# Altium PCB PCB3.PcbDoc
Units mm, origin at the board's own origin, x right, y up, seen from the top; angles counter-clockwise.
Board outline 150 x 100 mm, 2 copper layers (Top Layer, Bottom Layer); 89 components, 48 nets, 252 pads, 20 vias.
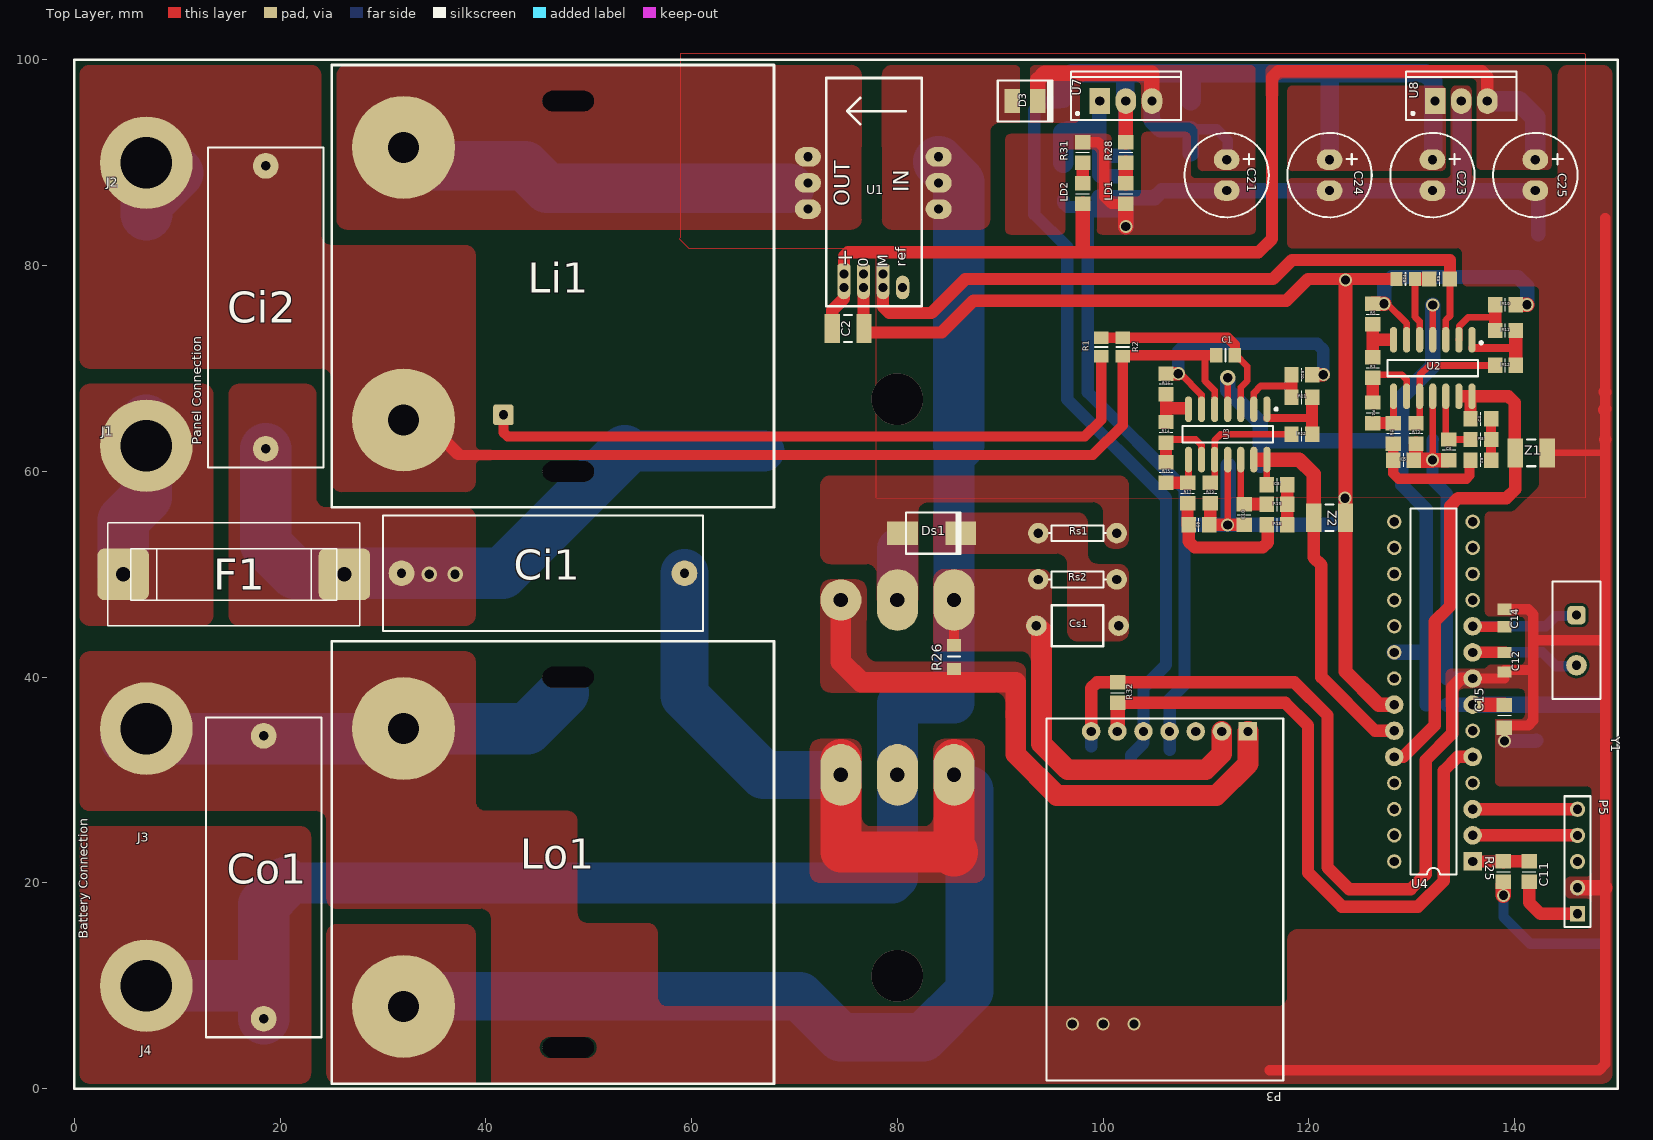
[diagram p0: Top Layer view]
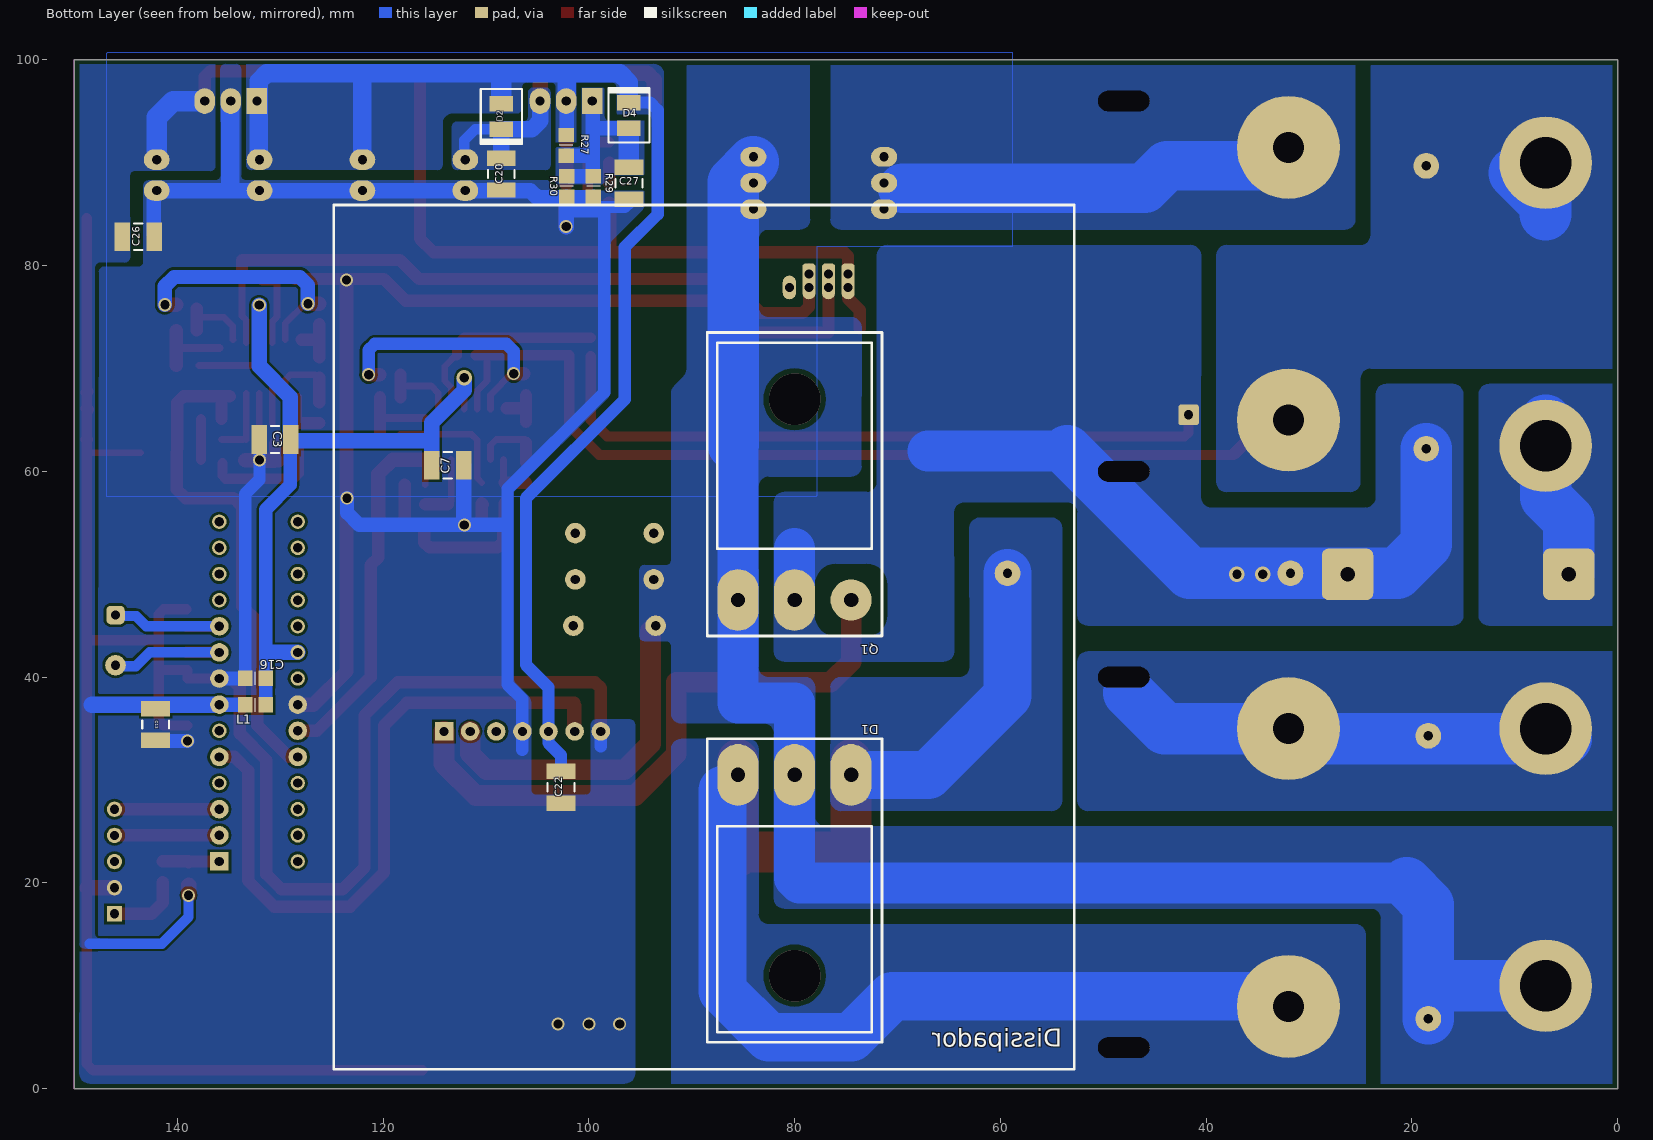
[diagram p1: Bottom Layer view, seen from below]

## Layer stack, top to bottom
Top Layer: signal copper 0.0356
Dielectric: dielectric 0.32, FR-4, Dk 4.8
Bottom Layer: signal copper 0.0356

## Board outline
0,0 0,100 150,100 150,0

## Design rules (kind name [scope] priority, off if disabled: settings)
Clearance "Clearance Digicart" [All] p1: gap=0.25
Height [All] p1: minheight=0 maxheight=50.8 prefheight=12.7
HoleSize [All] p1: absolutevalues=TRUE maxlimit=5.08 minlimit=0.025 maxpercent=80.000 minpercent=20.000
MinimumSolderMaskSliver [All] p1: minsoldermaskwidth=0.127
PolygonConnect [All] p1: connectstyle=Direct reliefconductorwidth=0.254 reliefentries=4 polygonreliefangle="90 Angle"
RoutingTopology Top [OnLayer('Top Layer')] p1: topology=Shortest
RoutingTopology Bottom [OnLayer('Bottom Layer')] p2: topology=Vertical
RoutingVias [All] p1: holewidth=0.711 width=1.27 viastyle="Through Hole" minholewidth=0.711 minwidth=1.27 maxholewidth=0.711 maxwidth=1.27
SilkscreenOverComponentPads SilkToSolderMaskClearance [IsPad] p1: minsilkscreentomaskgap=0.127
SolderMaskExpansion [All] p1: expansion=0.102
Width ClassPanelBetweenBatteryConnection [InNetClass('PanelBetweenBatteryConnection')] p1: maxlimit=5.08 minlimit=0.508 preferedwidth=4.826 minimp=50.000000 maximp=50.000000 favimp=50.000000
Width Width_1 [All] p2: maxlimit=5 minlimit=0.203 preferedwidth=0.254 minimp=50.000000 maximp=50.000000 favimp=50.000000
23 further rules are at their usual default settings.

## Classes and differential pairs
net class PanelBetweenBatteryConnection: +VBAT +VPANEL GND NetCi1_2 NetLi1_2 VPNL_N
component class voltageSupplies: C20 C21 C22 C23 C24 C25 C26 C27 D2 D3 D4 LD1 LD2 R27 R28 R29 R30 R31 U7 U8
component class uController: C11 C12 C13 C14 C15 C16 L1 P5 R25 R32 U4 U5 U6 Y1
component class Signals: C3 C4 C5 C6 C7 C8 C9 C10 R3 R4 R5 R6 R7 R8 R9 R10 R11 R12 R13 R14 R15 R16 R17 R18 R19 R20 R21 R22 R23 U2 U3 Z1 Z2
component class cuk: C1 C2 Ci1 Ci2 Co1 Cs1 D1 Ds1 F1 J1 J2 J3 J4 Li1 Lo1 P3 Q1 R1 R2 R24 R26 Rs1 U1

## Components (designator, comment, footprint, x,y, rotation, side; value= is the part's Value field where it differs from the comment)
C1 "Cap" 6-0805_N#1 111.9,71.3 r180 top
C2 "Cer" C1210_M 75.2,73.9 r0 top
C3 "Cer" C1210_M 130.5,63.1 r180 bottom
C4 "Cer" 6-0805_M#1 136.7,65.1 r180 top
C5 "Cer" 6-0805_M#1 129.2,61.1 r180 top
C6 "Cer" 6-0805_M#1 133.6,62.1 r90 top
C7 "Cer" C1210_M 113.7,60.6 r0 bottom
C8 "Cer" 6-0805_M#1 116.9,58.7 r180 top
C9 "Cer" 6-0805_M#1 109.3,54.8 r180 top
C10 "Cer" 6-0805_M#1 113.7,55.8 r90 top
C11 "Cap" 6-0805_M#1 141.4,21.1 r270 top
C12 "Cap" C0805#1 139,41.5 r90 top
C13 "Cap" C1210_M 142.1,35.4 r270 bottom
C14 "Cap" C0805#2 139,45.8 r270 top
C15 "Cap" 6-0805_M#2 139,36.3 r270 top
C16 "Cap" 6-0805_M#1 132.4,39.9 r0 bottom
C20 "Cap" C1210_M 108.5,88.9 r90 bottom
C21 "Cap" CAPELTR-RAD4.1-DPP3.0 112,87.3 r90 top
C22 "Cap" C1210_M 102.7,29.3 r90 bottom
C23 "Cap" CAPELTR-RAD4.1-DPP3.0 132,87.3 r90 top
C24 "Cap" CAPELTR-RAD4.1-DPP3.0 122,87.3 r90 top
C25 "Cap" CAPELTR-RAD4.1-DPP3.0 142,87.3 r90 top
C26 "Cap" C1210_M 143.8,82.8 r0 bottom
C27 "Cap" C1210_M 96.1,88 r90 bottom
Ci1 "Cap" "CAP4U7 EPCOS" 30,44.5 r0 top
Ci2 "Cap" "CAP4U7 EPCOS" 13,91.5 r270 top
Co1 "Cap" "CAP4U7 EPCOS" 24,5 r90 top
Cs1 "Cap" 100nF 95,45 r0 top
D1 "60APU06" TO-247AC_HORIZONTAL#1 80,11 r0 bottom
D2 "BYD77" SOD87#1 108.5,94.5 r270 bottom
D3 "Diode 1N4002" SOD87#1 92.4,96 r0 top
D4 "1N4002" SOD87#1 96.1,94.6 r90 bottom
Ds1 "BYD77" SOD87#2 83.5,54 r0 top
F1 "Fuse 1" "FUSE HOLDER 5X20" 15.5,50 r0 top
J1 "ManufacturerPartNumber" PARAFUSO#1 7.6,57.927 r0 top
J2 "ManufacturerPartNumber" PARAFUSO#2 8.1,84.3 r0 top
J3 "ManufacturerPartNumber" PARAFUSO#3 7.1,32.3 r0 top
J4 "ManufacturerPartNumber" PARAFUSO#4 7.1,11.3 r0 top
L1 "Ferrite Bead" 6-0805_M#1 132.4,37.3 r0 bottom
LD1 "RED" 6-0805_M#1 102.2,87 r270 top
LD2 "RED" 6-0805_M#1 98,87 r90 top
Li1 "Inductor" NEE-42-20-DEITADO#1 32,78 r90 top
Lo1 "Inductor" NEE-42-20-DEITADO#2 32,22 r90 top
P3 "Driver (INEP)" "Driver INEP" 117.5,36 r180 top
P5 "UART" HDR1X5 146.1,17 r90 top
Q1 "IRFP260" TO-247AC_HORIZONTAL#2 80,67 r180 bottom
R1 "Res1" 6-0805_N#1 99.8,72.1 r90 top
R2 "Res1" 6-0805_N#1 101.9,72.1 r270 top
R3 "1%" 6-0805_M#1 126.2,70.1 r90 top
R4 "1%" 6-0805_M#1 126.2,65.7 r90 top
R5 "1%" 6-0805_M#1 126.2,75.3 r270 top
R6 "1%" 6-0805_M#1 128.2,63.7 r90 top
R7 "1%" 6-0805_M#1 136.7,61.1 r180 top
R8 "1%" 6-0805_M#1 136.7,63.1 r0 top
R9 "1%" 6-0805_M#1 132.7,78.7 r180 top
R10 "1%" 6-0805_M#1 139.1,76.2 r0 top
R11 "1%" 6-0805_M#1 139.1,73.7 r180 top
R12 "1%" 6-0805_M#1 139.1,70.3 r0 top
R13 "1%" 6-0805_M#1 130.4,63.7 r90 top
R14 "1%" 6-0805_M#1 106.1,63.8 r90 top
R15 "1%" 6-0805_M#1 106.1,59.9 r90 top
R16 "1%" 6-0805_M#1 106.1,68.5 r270 top
R17 "1%" 6-0805_M#1 108.2,57.9 r90 top
R18 "1%" 6-0805_M#1 116.9,54.8 r180 top
R19 "1%" 6-0805_M#1 116.9,56.8 r0 top
R20 "1%" 6-0805_M#1 119.3,69.4 r0 top
R21 "1%" 6-0805_M#1 119.3,67.2 r180 top
R22 "1%" 6-0805_M#1 119.3,63.6 r0 top
R23 "1%" 6-0805_M#1 110.4,57.9 r90 top
R24 "Res1" 6-0805_N#1 129.4,78.7 r180 top
R25 "Res1" 6-0805_M#1 138.9,21.1 r270 top
R26 "Res1" 6-0805_N#2 85.5,42 r90 top
R27 "Res1" 6-0805_M#1 102.2,91.7 r270 bottom
R28 "Res1" 6-0805_M#1 102.2,91 r90 top
R29 "Res1" 6-0805_M#1 99.55,87.7 r90 bottom
R30 "Res1" 6-0805_M#1 102.15,87.7 r90 bottom
R31 "Res1" 6-0805_M#1 98,91 r270 top
R32 "Res1" 6-0805_M#1 101.4,38.5 r270 top
Rs1 "1%" AXIAL-0.3 97.5,54 r0 top
Rs2 "1%" AXIAL-0.3 97.5,49.5 r180 top (schematic designator Rs1)
U1 "LTSP 25-NP" "LTSP 25-NP" 84,85.5 r90 top
U2 "LP324M" M14A_M#1 132.03,70.05 r270 top
U3 "LP324M" M14A_M#2 112.1,63.6 r270 top
U4 "ATmega328p" 28P3 132.1,38.6 r90 top
U7 "TL783" TO-220AB 102.2,96 r0 top
U8 "LM7805" TO-220AB 134.8,96 r0 top
Y1 "ManufacturerPartNumber" HC-49U 146,43.6 r270 top
Z1 "5V1" C1210_M 141.6,61.8 r180 top
Z2 "5V1" C1210_M 122,55.5 r180 top

## Footprints (in the part's own frame and the unit in brackets; to place one, negate y for a bottom-side part, rotate by r counter-clockwise, add the part's x,y. Pads: shape width x height; smd on the part's side, far side on the other; paste and mask are expansions set on the pad)
6-0805_M#1 [mm] "Chip Resistor, Body 2.0x1.2mm, IPC Low Density"
  rect 1.4x1.5 smd: 1(-1,0) 2(1,0)
  silkscreen extent 0,-0.65 0,0.65, body extent -1.07,-0.7 1.07,0.7, height 0.7
6-0805_M#2 [mm] "Chip Resistor, Body 2.0x1.2mm, IPC Low Density"
  rect 1.4x1.5 smd: 1(-1,0) 2(1.2,0)
  silkscreen extent 0,-0.65 0,0.65, body extent -1.07,-0.7 1.07,0.7, height 0.7
6-0805_N#1 [mm] "Chip Resistor, Body 2.0x1.2mm, IPC Medium Density"
  rect 1.2x1.4 smd: 1(-0.9,0) 2(0.9,0)
  silkscreen extent 0,-0.6 0,0.6, body extent -1.07,-0.7 1.07,0.7, height 0.7
6-0805_N#2 [mm] "Chip Resistor, Body 2.0x1.2mm, IPC Medium Density"
  rect 1.2x1.4 smd: 1(-1.2,0) 2(1.1,0)
  silkscreen extent 0,-0.6 0,0.6, body extent -1.07,-0.7 1.07,0.7, height 0.7
28P3 [mm] "DIP; 28 Leads; Row Spacing 7.62 mm; Pitch 2.54 mm"
  rect 1.8x1.8 hole 0.9: 1(-16.51,-3.81)
  round 1.8 hole 0.9: 2(-13.97,-3.81) 3(-11.43,-3.81) 5(-6.35,-3.81) 7(-1.27,-3.81) 8(1.27,-3.81) 9(3.81,-3.81) 10(6.35,-3.81) 22(-1.27,3.81) 23(-3.81,3.81) 24(-6.35,3.81)
  round 1.4 hole 0.9: 4(-8.89,-3.81) 6(-3.81,-3.81) 11(8.89,-3.81) 12(11.43,-3.81) 13(13.97,-3.81) 14(16.51,-3.81) 15(16.51,3.81) 16(13.97,3.81) 17(11.43,3.81) 18(8.89,3.81) 19(6.35,3.81) 20(3.81,3.81) 21(1.27,3.81) 25(-8.89,3.81) 26(-11.43,3.81) 27(-13.97,3.81) 28(-16.51,3.81)
  silkscreen extent -17.78,-2.22 17.78,2.22
100nF [mm]
  round 2 hole 0.9: 1(-1.5,0) 2(6.5,0)
  silkscreen extent 0,-2 5,2
AXIAL-0.3 [mm] "Axial Device, Thru-Hole; 2 Leads; 0.3 in Pin Spacing"
  round 2 hole 0.9: 1(-3.81,0) 2(3.81,0)
  silkscreen extent -2.77,-0.76 2.77,0.76
C0805#1 [mm] "Chip Capacitor, Body 2.0x1.3mm, IPC High Density"
  rect 1.1x1.4 smd: 1(-1,0) 2(0.9,0)
  body extent -1.1,-0.72 1.1,0.72, height 1.4
C0805#2 [mm] "Chip Capacitor, Body 2.0x1.3mm, IPC High Density"
  rect 1.1x1.4 smd: 1(-0.8,0) 2(0.9,0)
  body extent -1.1,-0.72 1.1,0.72, height 1.4
C1210_M [mm] "Chip Capacitor, Body 3.2x2.5mm, IPC Low Density"
  rect 1.5x2.8 smd: 1(-1.55,0) 2(1.55,0)
  silkscreen extent -0.4,-1.3 0.4,1.3, body extent -1.7,-1.35 1.7,1.35, height 1.5
"CAP4U7 EPCOS" [mm]
  round 2.5 hole 0.9: 1(1.8,5.6) 2(29.3,5.6)
  silkscreen extent 0,0 31.1,11.2
CAPELTR-RAD4.1-DPP3.0 [mm] "Capacitor Eletrolitico Radial 4.1mm com 3.0mm entre pinos"
  oval 2x2.5 hole 0.9: 1(0,0) 2(3,0)
  silkscreen extent -2.6,-4.1 5.6,4.1
"Driver INEP" [mm] "Connector; Header; 7 Position"
  rect 1.8x1.8 hole 0.9: 1(3.429,1.27)
  round 1.8 hole 0.9: 2(5.969,1.27) 3(8.509,1.27) 4(11.049,1.27) 5(13.589,1.27) 6(16.129,1.27) 7(18.669,1.27)
  silkscreen extent 0,0 23,35.2
"FUSE HOLDER 5X20" [mm] "Fuse Holder for 5x20mm Fuses - Pin Spacing 21.5mm"
  rrect25% 5x5 hole 1.4: 1(-10.75,0) 2(10.75,0)
  silkscreen extent -12.25,-5 12.25,5, body extent -12.25,-5.05 12.15,4.95, height 10.5
HC-49U [mm] "Quartz Crystal, Thru-Hole; 2 Leads; Body 11.35 x 4.65 x 13.46 mm (LxWxH max)"
  rrect50% 1.8x1.8 hole 0.9: 1(-2.44,0)
  round 2 hole 0.9: 2(2.44,0)
  silkscreen extent -5.7,-2.35 5.7,2.35
HDR1X5 [mm] "Connector; Header; 5 Position"
  rect 1.5x1.5 hole 0.9: 1(0,0)
  round 1.5 hole 0.9: 2(2.54,0) 3(5.08,0) 4(7.62,0) 5(10.16,0)
  silkscreen extent -1.27,-1.27 11.43,1.27
"LTSP 25-NP" [mm] "Current Transducer (25 A)"
  oval 1.9x2.54 hole 0.9: 1(0,0) 2(2.54,0) 3(5.08,0) 4(5.08,12.7) 5(2.54,12.7) 6(0,12.7)
  oval 2.3x1.3 hole 0.9: 7(-7.62,9.2) 8(-7.62,7.3) 9(-7.62,5.4) 10(-7.62,3.5)
  silkscreen extent -9.46,1.65 12.74,10.92
M14A_M#1 [mm] "SOIC, 14-Leads, Body 8.6x3.9mm, Pitch 1.27mm, IPC Low Density"
  oval 2.5x0.7 smd: 1(-2.75,3.81) 2(-2.75,2.54) 3(-2.75,1.27) 4(-2.75,0) 5(-2.75,-1.27) 6(-2.75,-2.54) 7(-2.75,-3.81) 8(2.75,-3.81) 9(2.75,-2.54) 10(2.75,-1.27) 11(2.75,0) 12(2.75,1.27) 13(2.75,2.54) 14(2.75,3.81)
  silkscreen extent -2.57,-4.4 0.8,4.84, body extent -2,-4.38 2,4.38, height 1.75
M14A_M#2 [mm] "SOIC, 14-Leads, Body 8.6x3.9mm, Pitch 1.27mm, IPC Low Density"
  oval 2.5x0.7 smd: 1(-2.45,3.81) 2(-2.45,2.54) 3(-2.45,1.27) 4(-2.45,0) 5(-2.45,-1.27) 6(-2.45,-2.54) 7(-2.45,-3.81) 8(2.45,-3.81) 9(2.45,-2.54) 10(2.45,-1.27) 11(2.45,0) 12(2.45,1.27) 13(2.45,2.54) 14(2.45,3.81)
  silkscreen extent -2.57,-4.4 0.8,4.84, body extent -2,-4.38 2,4.38, height 1.75
NEE-42-20-DEITADO#1 [mm]
  round 10 hole 3: 1(-13,0) 2(13.5,0)
  silkscreen extent -21.5,-36 21.5,7
NEE-42-20-DEITADO#2 [mm]
  round 10 hole 3: 1(13,0) 2(-14,0)
  silkscreen extent -21.5,-36 21.5,7
PARAFUSO#1 [mm]
  round 9 hole 5: 1(-0.6,4.573)
PARAFUSO#2 [mm]
  round 9 hole 5: 1(-1.1,5.7)
PARAFUSO#3 [mm]
  round 9 hole 5: 1(-0.1,2.7)
PARAFUSO#4 [mm]
  round 9 hole 5: 1(-0.1,-1.3)
SOD87#1 [mm]
  rect 1.5x2.3 smd: A(-1.253,0) K(1.253,0)
  silkscreen extent -2.65,-2.01 2.65,2.01
SOD87#2 [mm]
  rect 3x2.3 smd: A(-3,0) K(2.65,0)
  silkscreen extent -2.65,-2.01 2.65,2.01
TO-220AB [mm] "TO, Thru-Hole, Vertical, Heatsink Mounted; 3 In-Line Leads; Pitch 2.54 mm"
  rect 2x2.5 hole 0.9: 1(-2.54,0)
  oval 2x2.5 hole 0.9: 2(0,0) 3(2.54,0)
  silkscreen extent -5.35,-1.85 5.35,2.85, body extent -5.4,-1.9 5.4,2.9, height 19.3
TO-247AC_HORIZONTAL#1 [mm]
  oval 4x6 hole 1.4: 1(-5.5,-19.5) 2(0,-19.5) 3(5.5,-19.5)
  silkscreen extent -8.5,-23 8.5,6.5, body extent -7.75,-19.8 7.75,5.6, height 8
TO-247AC_HORIZONTAL#2 [mm]
  round 4 hole 1.4: 1(5.5,-19.5)
  oval 4x6 hole 1.4: 2(0,-19.5) 3(-5.5,-19.5)
  silkscreen extent -8.5,-23 8.5,6.5, body extent -7.75,-19.8 7.75,5.6, height 8

## Part data
C1 C11 C13 C15 C16 C20 C21 C22 C23 C24 C25 C26 C27 Ci1 Ci2 Co1 Cs1: "Capacitor"
C2 C3 C4 C5 C6 C7 C8 C9 C10: library part Cap, "Capacitor"
C12 C14: library part "Cap Semi", "Capacitor (Semiconductor SIM Model)"
D2 D4 Ds1: library part "Diode 1N4002", "1 Amp General Purpose Rectifier"
D3: "1 Amp General Purpose Rectifier"
F1: "Fuse"
J1 J2 J3 J4: library part PIN_BIG
L1: library part Inductor, "Inductor"
LD1 LD2: library part LED, "Diodo Emissor de Luz"
P3: library part "Header 7", "Header, 7-Pin"
P5: library part "Header 5", "Header, 5-Pin"
Q1: "HEXFET Power MOSFET"
R1 R2 R24 R25 R26 R27 R28 R29 R30 R31 R32: "Resistor"
R3 R4 R5 R6 R7 R8 R9 R10 R11 R12 R13 R14 R15 R16 R17 R18 R19 R20 R21 R22 R23 Rs1 Rs2: library part Res1, "Resistor"
U1: "Current Transducer LTSP (25 A)"
U2 U3: "Micropower Quad Operational Amplifier"
U4: library part ATmega8-16PI, "8-Bit AVR Microcontroller with 8K Bytes of In-System Programmable Flash Memory"
U7: library part L7805ACV, "Precision 1A Regulator"
U8: library part µA7805CKC, "Positive-Voltage Regulator"
Y1: library part Crystal, "Crystal Oscillator"
Z1 Z2: library part "D Zener", "Zener Diode"

## Free pads (board coordinates)
  rrect100% 5x1 hole 2 slot 5 at 0 deg: 0(48,4) 0(48,40) 0(48,60) 0(48,96)
  rrect50% 1.3x2 hole 0.9: 1(74.8,79.2) 1(76.7,79.2) 1(78.6,79.2)
  rrect25% 2x2 hole 0.9: 2(41.7,65.5)

## Via types
v1: diameter 1.27, hole 0.9, Top Layer to Bottom Layer, 15 vias
v2: diameter 1.5, hole 0.9, Top Layer to Bottom Layer, 3 vias
v3: diameter 5, hole 5, Top Layer to Bottom Layer, 2 vias

## Nets (pads, with @x,y where several pads share a name; then routed paths per layer and width w, separated by ;. In a path a pad name is that pad's centre, name@x,y a point inside that pad or via, vN(x,y) a via of type N, cw(c..) or ccw(c..) an arc to the next point about the centre after c; other vN are vias at no path point)
+5V: C2.1 C13.1 C15.1 C25.2 C26.2 L1.2 LD2.1 pad.1@74.8,79.2 R25.2 U1.7 U4.7 U8.3 | length 133.7
  Top Layer w1: C15.1@138.97,37.33 C15.1
  Top Layer w1.2: C2.1 73.65,75.65 74.8,76.8 U1.7 ; pad.1@74.8,79.3 74.8,80.9 75.2,81.3 115.1,81.3 116.4,82.6 116.4,98.3 117,98.9 136.8,98.9 137.34,98.36 137.34,96.2 U8.3@137.14,96
  Top Layer w1.4: 98,81.7 LD2.1 ; U4.7 C15.1@138.97,37.33
  Top Layer w1.5: v1(138.9,18.8) R25.2@138.9,19.8
  Bottom Layer w1: L1.2 L1.2@133.43,37.33 ; v1(138.9,18.8) 138.9,16.7 141.5,14.1 148.5,14.1 ; 148.33,37.33 148.5,37.5
  Bottom Layer w1.4: L1.2@133.43,37.33 U4.7
  Bottom Layer w1.6: U4.7 148.33,37.33
  Bottom Layer w2: U8.3 140.4,96 142,94.4 C25.2
+5V_ADC: C3.2 C7.2 C16.1 L1.1 U2.4 U3.4 U4.20 | length 73.7
  Top Layer w0.65: U3.4 v2@112.1,68.9 ; U2.4@132.03,72.5 U2.4 v1(132.03,76.17)
  Bottom Layer w1.3: C3.2@129,63 129,58.7 131.4,56.3 C16.1 L1.1
  Bottom Layer w1.5: v2@112.1,68.9 112.1,67.9 115.25,64.75 C7.2 ; 115.25,63 C3.2@129,63 ; U4.20 131.1,42.41 ; C3.2@129,63.1 129,67.2 132.03,70.23 v1(132.03,76.17)
  other v2: 112.1,69.1
+12V: C22.2 C23.2 C24.2 D2.A D4.K P3.5 R27.1 R28.2 U7.2 U8.1 | length 141.8
  Top Layer w0.508: U7.2@102.16,96.84 102.16,95.9 U7.2@102.3,96.04
  Top Layer w1.4: U7.2@102.16,95.9 102.2,95.86 R28.2
  Bottom Layer w1.2: D4.K@95.753,95.853 94.053,95.853 93.3,95.1 93.3,85 96.5,81.8 96.5,67 106.1,57.4 106.1,41.2 103.911,39.011 P3.5 103.911,33.611 102.7,32.4 C22.2
  Bottom Layer w1.4: U7.2@102.16,95.9 102.16,92.74 R27.1 ; 108.5,98.1 108.5,98.7
  Bottom Layer w1.5: U7.2@102.16,95.9 U7.2@102.25,95.81
  Bottom Layer w1.8: D4.K@96.1,96.2 96.1,97.8 97,98.7 102.16,98.7 ; U7.2@102.16,95.9 102.16,98.7 ; C24.2 122,98.7 ; C23.2@132.06,90.3 132.06,97.94 131.3,98.7 122,98.7 ; 102.16,98.7 108.5,98.7 122,98.7
  Bottom Layer w2: D2.A@108.5,96.1 108.5,98.1
+VBAT: Co1.1 Cs1.1 D1.2 D3.A J4.1 P3.2 Q1.3 R26.2 Rs2.2 U1.1 U1.2 U1.3 | length 197.6
  Top Layer w1: R26.2@85.5,43.6 Q1.3
  Top Layer w2: Cs1.1 94,44.5 94,33.536 96.536,31 109.964,31 111.531,32.567 P3.2
  Bottom Layer w4: 20.5,20 79.5,20 80,20.5 D1.2 80,37.5 85.5,37.5 Q1.3 85.5,62.128
  Bottom Layer w5: J4.1 18.4,10 ; Co1.1 18.4,10 ; 20.5,20 18.4,17.9 18.4,10 ; U1.3@84,90.08 85.953,88.127 85.953,62.581
+VPANEL: Ci1.1 Ci2.2 Ds1.A F1.2 pad.0@48,60 pad.2 Q1.2 R1.1 Rs1.2 | length 135.6
  Top Layer w1: pad.2 41.7,63.8 42.1,63.4 98.2,63.4 99.8,65 R1.1
  Bottom Layer w4: 53.5,62 67,62 ; Q1.2 80,52.5
  Bottom Layer w5: Ci2.2 18.6,52.9 21.4,50.1 Ci1.1 41.6,50.1 53.5,62
  other v2: 34.5,50 37,50
GATE: P3.1 Q1.1 R26.1 | length 59.5
  Top Layer w2: Q1.1 74.5,41.5 76.5,39.5 85.5,39.5 91.5,39.5 91.5,32.5 95.5,28.5 111,28.5 114.071,31.571 P3.1
GND: C2.2 C3.1 C5.1 C6.1 C7.1 C9.1 C10.1 C12.1 C13.2 C14.1 C15.2 C16.2 C20.1 C21.1 C22.1 C23.1 C24.1 C25.1 C26.1 C27.1 Co1.2 J3.1 LD1.2 Lo1.1 P3.4 P3.7 P5.2 pad.0@48,40 pad.1@76.7,79.2 R13.1 R23.1 R24.2 R29.1 R30.1 R31.1 R32.1 U1.8 U2.11 U3.11 U4.8 U4.22 U8.2 Z1.1 Z2.1 | length 588.5
  Top Layer w0.65: v1(112.1,54.8) U3.11 ; v1@132.025,61.1 132.025,67.595 U2.11@132.03,67.6 ; C6.1@133.4,61.1 C6.1 ; Z1.1@143.55,61.8 148.8,61.8
  Top Layer w1: R31.1 99.5,92 100.1,91.4 100.1,86.7 100.8,86 LD1.2@101.9,86 ; 116.2,1.8 148.2,1.8 148.8,2.4 148.8,43.6 ; U4.8 139,39.87 139,40.7 141.5,40.7 141.8,41 ; C15.2@139,35.3 141.3,35.3 141.8,35.8 141.8,41 ; C14.1@139.1,46.6 141.3,46.6 141.8,46.1 141.8,41 ; 142.1,43.6 148.8,43.6 ; 148.8,84.6 148.8,67.7 148.8,66.1 148.8,63.1 148.8,43.6
  Top Layer w1.2: U1.8 76.7,73.5 84.3,73.5 87.4,76.6 117.8,76.6 119.9,78.7 R24.2 ; P3.7 98.831,38.931 99.4,39.5 R32.1 118.6,39.5 121.8,36.3 121.8,21.504 123.904,19.4 129.896,19.4 131.35,20.854 131.35,31.95 133.91,34.51 133.91,39.01 134.77,39.87 U4.8 ; R23.1@110.3,56.8 R23.1 110.4,54.9 C9.1 v1(112.1,54.8) C10.1 ; v1(132,61.1) v1@132.025,61.1 ; 148.7,66 148.8,66.1 ; 148.75,67.75 148.8,67.7
  Top Layer w1.4: v1(123.55,78.6) Z2.1 123.55,40.55 126.77,37.33 U4.22 ; C5.1 130.4,61.3 R13.1 ; v1@132.025,61.1 C6.1@133.4,61.1
  Top Layer w1.5: v1(102.2,83.8) LD1.2@102.2,85.7 ; C5.1@130.6,61.1 v1(132,61.1) ; P5.2 148.76,19.54
  Bottom Layer w1: C16.2 C16.2@133.43,39.87
  Bottom Layer w1.2: C27.1 96.1,86.1 96.5,85.7 100.5,85.7 R30.1@101.4,86.6 ; 98.831,33.269 P3.7 ; 102.2,85.3 98.5,85.3 98.5,67.7 107.9,58.3 107.9,39.3 106.451,37.851 P3.4 106.451,32.951 ; C3.1 132,63.05 v1(132,61.1) 132,59.2 133.4,57.8 C16.2
  Bottom Layer w1.4: R29.1@99.55,86.6 R29.1 ; 108.1,54.8 v1(112.1,54.8) 122.3,54.8 123.5,56 v1(123.5,57.4) ; C16.2@133.43,39.87 U4.8 ; v1(139,33.8) 142.05,33.8 C13.2 ; C26.1@142.3,83.05 C25.1@142.3,87.3
  Bottom Layer w1.5: R29.1@99.55,86.6 101.4,86.6 R30.1@102.1,86.6 ; v1(102.2,83.8) 102.2,85.3 R30.1@102.2,86.6 ; R30.1@102.2,86.65 R30.1@102.2,86.6 ; v1@112.15,54.85 C7.1 ; C25.1 C21.1 105.7,87.3 105,86.6 R30.1@102.2,86.6
  Bottom Layer w1.8: 134.85,87.7 U8.2@134.85,95.95
  Bottom Layer w5: J3.1@5,34 Lo1.1@32,34 ; Lo1.1 44,35 47.5,38.5
  other v1: 97,6.3 100,6.3 103,6.3
NetC4_1: C4.1 R7.1 R8.2 | length 4
  Top Layer w1: R7.1 R8.2 C4.1
NetC4_2: C4.2 U2.13 U2.14 U4.24 Z1.2 | length 49.7
  Top Layer w1.2: U4.24 129.15,32.25 132.21,35.31 132.21,45.41 133.7,46.9 133.7,56.6 134.5,57.4 139.2,57.4 140.05,58.25 Z1.2 ; U2.13@134.9,67.3 U2.14 ; C4.2 135.7,67.16 U2.14 ; Z1.2@140,62.25 140,66.7 139.4,67.3 U2.14
NetC5_2: C5.2 R6.1 R7.2 | length 11.8
  Top Layer w1: R6.1 128.2,59.8 128.7,59.3 135.3,59.3 135.6,59.6 R7.2@135.6,60.8
NetC6_2: C6.2 R8.1 U2.12 | length 6.6
  Top Layer w0.65: C6.2@133.3,63.1 U2.12@133.3,67.6 ; C6.2 R8.1
NetC8_1: C8.1 R18.1 R19.2 | length 3.9
  Top Layer w1.2: R18.1@117.8,54.8 117.9,54.9 R19.2 C8.1
NetC8_2: C8.2 U3.13 U3.14 U4.23 Z2.2 | length 37.3
  Top Layer w0.65: C8.2 115.91,58.71 U3.14@115.91,60.79
  Top Layer w1.2: Z2.2@120.45,55.7 120.45,51.65 121.2,50.9 121.2,40 126.41,34.79 U4.23
  Top Layer w1.4: 115,61.15 115.55,61.15 ; U3.14 119.05,61.15 120.45,59.75 Z2.2
NetC9_2: C9.2 R17.1 R18.2 | length 13.4
  Top Layer w1.2: C9.2@108.2,54.8 R17.1 ; C9.2 108.3,53.2 108.9,52.6 115.5,52.6 116,53.1 R18.2@116,54.6
NetC10_2: C10.2 R19.1 U3.12 | length 6.7
  Top Layer w0.65: U3.12 113.37,57.13 C10.2
  Top Layer w1.2: C10.2 R19.1
NetC11_1: C11.1 R25.1 U4.1 | length 5.5
  Top Layer w1.2: U4.1 138.81,22.09 R25.1@138.9,22 ; R25.1 C11.1
NetC12_2: C12.2 U4.9 Y1.2 | length 13.8
  Top Layer w1: C12.2@139.09,42.41 C12.2@139.1,42.4
  Top Layer w1.1: U4.9 C12.2@139.09,42.41
  Bottom Layer w1: U4.9 142.69,42.41 144.04,41.06 Y1.2@146,41.06
NetC14_2: C14.2 U4.10 Y1.1 | length 13.7
  Top Layer w1: U4.10 135.96,44.9 C14.2@139.1,44.9
  Bottom Layer w1: U4.10 143,44.95 143.99,45.94 Y1.1@146,45.94
NetC20_2: C20.2 C21.2 D2.K D3.K U7.3 | length 30.3
  Top Layer w1.5: D3.K 93.653,98.053 94.3,98.7 104.7,98.7 U7.3@104.7,95.9
  Bottom Layer w1: D2.K 111.053,93.247 112.1,92.2 C21.2@112.1,90.4
  Bottom Layer w1.6: U7.3@104.7,95.9 104.7,94.1 105.553,93.247 D2.K C20.2@108.5,90.9
NetC27_2: C27.2 D4.A R27.2 R29.2 R30.2 U7.1 | length 18.4
  Top Layer w0.508: U7.1@99.62,95.42 U7.1@99.62,95.9
  Bottom Layer w1.4: D4.A@96.547,93.347 99.453,93.347 ; U7.1@99.75,95.77 99.62,95.9 99.62,90.7 ; R30.2@101.85,88.7 99.75,88.7 99.62,88.83 99.62,90.7 ; R27.2 99.62,90.7
  Bottom Layer w2: C27.2@96.1,90 D4.A@96.1,92.9
NetCi1_2: Ci1.2 D1.1 D1.3 Lo1.2 pad.0@48,4 | length 135.3
  Top Layer w4: D1.1@74.5,32 74.5,23 85.5,23 D1.3@85.5,32
  Bottom Layer w4.699: Lo1.2@32,9 70.5,9 74.5,5 82.5,5 87,9.5 D1.3@87,29 ; Ci1.2 59.3,38.2 67,30.5 72.5,30.5
NetCs1_2: Cs1.2 Ds1.K Rs1.1 Rs2.1
NetF1_1: F1.1 J1.1 | length 15.9
  Bottom Layer w5: F1.1 4.75,55.25 7,57.5 J1.1@7,65
NetLD1_1: LD1.1 R28.1 | length 2
  Top Layer w1.4: LD1.1 R28.1
NetLD2_2: LD2.2 R31.2 | length 2
  Top Layer w1.2: LD2.2 R31.2
NetLi1_2: Li1.2 pad.0@48,96 U1.4 U1.5 U1.6 | length 38.3
  Bottom Layer w4.826: Li1.2@32.1,89.7 43.8,89.7 45.96,87.54 69.5,87.54
NetR3_1: R3.1 R4.2 U2.9 | length 6.8
  Top Layer w0.65: R3.1@126.6,69.41 128.99,69.41 129.49,68.91 U2.9@129.49,67.6
  Top Layer w1.2: R4.2 R3.1
NetR3_2: R3.2 R5.2 U2.7 | length 4.7
  Top Layer w1.2: R3.2 R5.2 ; 126.4,72.8 U2.7@127.9,72.8
NetR4_1: R4.1 R6.2 U2.8 | length 4.6
  Top Layer w0.65: R6.2 128.22,64.72 U2.8
  Top Layer w1.2: R4.1 R6.2
NetR5_1: R5.1 R10.2 U2.6 | length 25
  Top Layer w0.65: v1(127.3,76.3) 127.6,76.3 129.49,74.41 U2.6
  Top Layer w1.4: R5.1 v1(127.3,76.3) ; R10.2 v1(141.2,76.2)
  Bottom Layer w1.4: v1(127.3,76.3) 127.3,78.1 128.1,78.9 140.3,78.9 141.2,78 v1(141.2,76.2)
NetR10_1: R10.1 R11.2 U2.2 | length 7.3
  Top Layer w0.65: U2.2 134.6,72.83 134.6,74.1 135.5,75 138.1,75
  Top Layer w1.2: R11.2 R10.1@138.1,75.8
NetR11_1: R11.1 R12.2 U2.1 | length 7.6
  Top Layer w0.8: U2.1@135.9,72 140.1,72
  Top Layer w1.3: R12.2 140.1,72.1 R11.1
NetR12_1: R12.1 R13.2 U2.10 | length 12.3
  Top Layer w0.65: R13.2@130.76,64.6 130.76,69.36 131.7,70.3 R12.1@137.9,70.3
NetR14_1: R14.1 R15.2 U3.9 | length 6.9
  Top Layer w0.65: R14.1@106.2,63.1 109,63.1 109.56,62.54 U3.9
  Top Layer w1.2: R15.2 R14.1
NetR14_2: R14.2 R16.2 U3.7 | length 4.5
  Top Layer w1.2: R14.2 106.1,66 ; R16.2@106.1,67.4 106.1,66 ; 106.15,66.05 106.1,66 ; 106.15,66.15 U3.7@108,66.15
NetR15_1: R15.1 R17.2 U3.8 | length 4.4
  Top Layer w0.65: R17.2 108.29,58.99 U3.8
  Top Layer w1.2: R15.1 R17.2
NetR16_1: R16.1 R20.2 U3.6 | length 25.8
  Top Layer w0.65: v1(107.3,69.5) 107.5,69.5 109.56,67.44 U3.6
  Top Layer w1.3: R16.1@106.3,69.5 v1(107.3,69.5) ; R20.2 v1(121.4,69.4)
  Bottom Layer w1.2: v1(107.3,69.5) 107.3,71.7 108,72.4 120.8,72.4 121.4,71.8 v1(121.4,69.4)
NetR20_1: R20.1 R21.2 U3.2 | length 7.7
  Top Layer w0.65: U3.2 114.64,67.64 115.3,68.3 118.3,68.3
  Top Layer w1.2: R21.2 118.3,68.3 R20.1
NetR21_1: R21.1 R22.2 U3.1 | length 7.7
  Top Layer w0.8: U3.1@115.96,65.2 120.1,65.2
  Top Layer w1.2: R22.2 120.3,65.4 R21.1
NetR22_1: R22.1 R23.2 U3.10 | length 12
  Top Layer w0.65: R23.2 110.83,59.33 U3.10 110.83,63.03 111.4,63.6 R22.1
PWM: P3.6 R32.2 U4.5 | length 65.9
  Top Layer w1.2: R32.2 117.7,37.5 119.9,35.3 119.9,21 123.2,17.7 130.6,17.7 133.1,20.2 133.1,30.9 134.45,32.25 U4.5
  Top Layer w1.4: P3.6@101.4,34.759 R32.2@101.4,37.2
  Top Layer w1.524: P3.6 P3.6@101.4,34.759
RTS: C11.2 P5.1 | length 7.2
  Top Layer w1.2: C11.2 141.4,18.1 142.5,17 P5.1
SNS_IN: pad.1@78.6,79.2 R9.1 U1.9 U2.3 | length 69.7
  Top Layer w0.65: U2.3@133.3,72.5 133.3,74.7 133.7,75.1 R9.1
  Top Layer w1.2: U1.9@78.6,77.45 U1.9 ; pad.1@78.6,79.6 78.6,79.2 U1.9 ; R9.1 133.7,80.55 118.35,80.55 116.5,78.7 86.6,78.7 83.3,75.4 79.2,75.4 78.6,76 U1.9
SNS_REF: R9.2 R24.1 U2.5 | length 7.3
  Top Layer w0.65: R24.1 130.3,75.026 130.76,74.566 U2.5@130.76,72.5
  Top Layer w1.3: R24.1@130.82,78.7 R9.2
USART_RX: P5.4 U4.2 | length 10.2
  Top Layer w1.2: U4.2 146.09,24.63 P5.4
USART_TX: P5.5 U4.3 | length 10.2
  Top Layer w1.2: U4.3 146.09,27.17 P5.5
VPNL_IN: C1.1 R1.2 R2.1 U3.3 | length 20.5
  Top Layer w0.65: C1.1@112.8,71.4 114,70.2 114,68.8 113.37,68.17 U3.3
  Top Layer w1: R1.2 112.1,73 112.8,72.3 C1.1 C1.1@112.8,71.4
VPNL_N: C1.2 Ci2.1 J2.1 Li1.1 R2.2 U3.5 | length 94.2
  Top Layer w0.65: 109.9,70.8 109.9,68.8 110.83,67.87 U3.5
  Top Layer w1: 37.3,61.6 99,61.6 101.9,64.5 101.9,71.3 C1.2
  Top Layer w1.2: Li1.1@35.8,63.2 37.3,61.7
  Bottom Layer w5.08: 7,85 7,86 J2.1@10,89
pads on no net: P3.3 P5.3 U1.10 U4.4 U4.6 U4.11 U4.12 U4.13 U4.14 U4.15 U4.16 U4.17 U4.18 U4.19 U4.21 U4.25 U4.26 U4.27 U4.28
copper on no net:
  other v3: 80,11 80,67

## Polygon pours and split planes (outlines as drawn)
GND on Top Layer "Fonte Chaveada" (solid, shelved, pour order 8): 58.9,100.6 58.9,82.7 58.8,82.6 59.7,81.7 77.9,81.7 77.9,57.5 78,57.4 146.9,57.5 146.9,100.5 146.8,100.6
GND on Bottom Layer "Fonte Chaveada" (solid, shelved, pour order 35): 58.839,100.73 58.839,82.83 58.839,81.83 59.639,81.83 77.839,81.83 77.839,57.63 77.939,57.53 146.839,57.53 146.839,100.63 146.739,100.73
+5V on Bottom Layer "Bottom Overlay-No Net" (solid, pour order 60): 136.3,99.6 136.3,89.7 ccw(c136.8,89.7) 136.8,89.2 144.1,89.2 cw(c144.1,88.7) 144.6,88.7 144.6,80.8 ccw(c145.1,80.8) 145.1,80.3 147.5,80.3 cw(c147.5,79.8) 148,79.8 148,15.1 cw(c147.5,15.1) 147.5,14.6 146.8,14.6 146.8,13.6 149,13.6 ccw(c149,14.1) 149.5,14.1 149.5,99.6
GND on Bottom Layer "Bottom Overlay-No Net" (solid, pour order 64): 94.6,87.3 103.5,87.3 ccw(c103.5,87.6) 103.8,87.6 103.8,88 cw(c104.1,88) 104.1,88.3 133.3,88.3 ccw(c133.3,88.8) 133.8,88.8 133.8,99.1 cw(c134.3,99.1) 134.3,99.6 135.3,99.6 cw(c135.3,99.1) 135.8,99.1 135.8,88.8 ccw(c136.3,88.8) 136.3,88.3 142.8,88.3 cw(c142.8,87.8) 143.3,87.8 143.3,80.4 ccw(c143.8,80.4) 143.8,79.9 147.1,79.9 cw(c147.1,79.4) 147.6,79.401 147.7,13.3 149.5,13.3 149.5,1.5 cw(c148.5,1.5) 148.5,0.5 96.5,0.5 cw(c96.5,1.5) 95.5,1.5 95.5,35.4 cw(c96,35.4) 96,35.9 99.3,35.9 cw(c99.3,35.4) 99.8,35.4 99.8,29.1 ccw(c100.3,29.1) 100.3,28.6 105.1,28.6 ccw(c105.1,29.1) 105.6,29.1 105.6,37.5 cw(c106.566,37.5) 105.883,38.183 107.017,39.317 ccw(c106.334,40) 107.3,40 107.3,58 98.112,67.188 cw(c98.624,67.7) 97.9,67.7 97.9,82 ccw(c97.176,82) 97.688,82.512 94.812,85.388 cw(c95.324,85.9) 94.6,85.9
+12V on Bottom Layer "Bottom Overlay-No Net" (solid, pour order 50): 92.7,98.6 cw(c93.7,98.6) 93.7,99.6 133.3,99.6 133.3,89.8 cw(c132.8,89.8) 132.8,89.3 114.7,89.3 cw(c114.7,89.8) 114.2,89.8 114.2,93.8 ccw(c113.2,93.8) 113.2,94.8 107,94.8 cw(c107,95.3) 106.5,95.3 106.5,97.3 ccw(c106,97.3) 106,97.8 103.7,97.8 ccw(c103.7,97.3) 103.2,97.3 103.2,92 101.2,92 101.2,97.8 97.8,97.8 ccw(c97.8,97.3) 97.3,97.3 97.3,94.7 94.4,94.7 ccw(c94.4,94.2) 93.9,94.2 93.9,93.5 92.7,93.5
NetC27_2 on Bottom Layer "Bottom Overlay-No Net" (solid, pour order 66): 94.6,94.1 94.6,88.8 97.4,88.8 cw(c97.4,88.076) 97.912,88.588 98.388,88.112 ccw(c98.9,88.624) 98.9,87.9 103.2,87.9 103.2,91.5 101.2,91.5 cw(c101.2,92) 100.7,92 100.7,97.3 98.5,97.3 98.5,94.6 cw(c98,94.6) 98,94.1
NetC20_2 on Bottom Layer "Bottom Overlay-No Net" (solid, pour order 62): 103.7,96.8 cw(c104.2,96.8) 104.2,97.3 105.4,97.3 cw(c105.4,96.8) 105.9,96.8 105.9,94.5 ccw(c106.4,94.5) 106.4,94 112.8,94 cw(c112.8,93.5) 113.3,93.5 113.3,89.8 cw(c112.8,89.8) 112.8,89.3 104.2,89.3 cw(c104.2,89.8) 103.7,89.8
NetF1_1 on Bottom Layer "Top Layer-No Net" (solid, remove dead copper, pour order 29): 0.5,68.5 12.5,68.5 cw(c12.5,67.5) 13.5,67.5 13.5,46 cw(c12.5,46) 12.5,45 0.5,45
NetCi1_2 on Bottom Layer "Top Layer-No Net" (solid, remove dead copper, pour order 34): 54,54.5 cw(c55,54.5) 55,55.5 62,55.5 cw(c62,54.5) 63,54.5 63,41 ccw(c64,41) 64,40 75.5,40 cw(c75.5,39) 76.5,39 76.5,28 cw(c75.5,28) 75.5,27 55,27 cw(c55,28) 54,28
NetCi1_2 on Bottom Layer "Top Layer-No Net" (solid, remove dead copper, pour order 40): 24.5,15 cw(c25.5,15) 25.5,16 82.5,16 ccw(c82.5,17) 83.5,17 83.5,33 cw(c84.5,33) 84.5,34 91,34 cw(c91,33) 92,33 92,0.5 24.5,0.5
GND on Bottom Layer "Top Layer-No Net" (solid, remove dead copper, pour order 36): 0.5,42.5 51.5,42.5 cw(c51.5,41.5) 52.5,41.5 52.5,28 cw(c51.5,28) 51.5,27 0.5,27
VPNL_N on Bottom Layer "Top Layer-No Net" (solid, remove dead copper, pour order 27): 0.5,99.5 24,99.5 24,83 ccw(c25,83) 25,82 38,82 cw(c38,81) 39,81 39,59 cw(c38,59) 38,58 26,58 cw(c26,59) 25,59 25,69 ccw(c24,69) 24,70 0.5,70
NetLi1_2 on Bottom Layer "Top Layer-No Net" (solid, remove dead copper, pour order 33): 25.5,99.5 25.5,84.5 ccw(c26.5,84.5) 26.5,83.5 75.5,83.5 ccw(c75.5,84.5) 76.5,84.5 76.5,99.5
+VPANEL on Bottom Layer "Top Layer-No Net" (solid, remove dead copper, pour order 31): 15,67.5 cw(c16,67.5) 16,68.5 22.5,68.5 cw(c22.5,67.5) 23.5,67.5 23.5,57.5 ccw(c24.5,57.5) 24.5,56.5 39.5,56.5 ccw(c39.5,57.5) 40.5,57.5 40.5,81 cw(c41.5,81) 41.5,82 71,82 cw(c71,81) 72,81 72,59 ccw(c73,59) 73,58 81,58 cw(c81,57) 82,57 82,42.5 cw(c81,42.5) 81,41.5 65.5,41.5 cw(c65.5,42.5) 64.5,42.5 64.5,47.5 71,47.5 71,46 ccw(c73,46) 73,44 76,44 ccw(c76,46) 78,46 78,49 ccw(c76,49) 76,51 73,51 ccw(c73,49) 71,49 71,47.5 64.5,47.5 64.5,56 ccw(c63.5,56) 63.5,57 53.5,57 ccw(c53.5,56) 52.5,56 52.5,46 cw(c51.5,46) 51.5,45 16,45 cw(c16,46) 15,46
+VBAT on Bottom Layer "Top Layer-No Net" (solid, remove dead copper, pour order 37): 78.5,99.5 90.5,99.5 90.5,70 ccw(c91.707,70) 90.854,69.146 91.646,68.354 cw(c90.793,67.5) 92,67.5 92,51.4 ccw(c92.5,51.4) 92.5,50.9 94.6,50.9 cw(c94.6,50.4) 95.1,50.4 95.1,44 cw(c94.6,44) 94.6,43.5 92.5,43.5 ccw(c92.5,43) 92,43 92,36.5 cw(c91,36.5) 91,35.5 83,35.5 ccw(c83,34.5) 82,34.5 82,18.5 cw(c81,18.5) 81,17.5 24,17.5 ccw(c24,16.5) 23,16.5 23,0.5 0.5,0.5 0.5,25.5 77,25.5 ccw(c77,26.5) 78,26.5 78,38.999 cw(c79.001,38.999) 79.001,40 82.5,40 ccw(c82.5,41) 83.5,41 83.5,42.5 83.5,58.5 ccw(c82.5,58.5) 82.5,59.5 74.5,59.5 cw(c74.5,60.5) 73.5,60.5 73.5,74 cw(c74.5,74) 74.5,75 82.5,75 ccw(c82.5,76) 83.5,76 83.5,82.5 ccw(c82.5,82.5) 82.5,83.5 79.5,83.5 cw(c79.5,84.5) 78.5,84.5
NetCi1_2 on Top Layer "Top Layer-No Net" (solid, remove dead copper, pour order 39): 24.5,1.5 ccw(c25.5,1.5) 25.5,0.5 39,0.5 39,15 ccw(c38,15) 38,16 25.5,16 ccw(c25.5,15) 24.5,15
GND on Top Layer "Bottom Overlay-No Net" (solid, pour order 56): 133.8,97 cw(c134.3,97) 134.3,97.5 135.3,97.5 cw(c135.3,97) 135.8,97 135.8,89 ccw(c136.3,89) 136.3,88.5 143.7,88.5 ccw(c143.7,89) 144.2,89 144.2,98.5 cw(c145.2,98.5) 145.2,99.5 148.5,99.5 cw(c148.5,98.5) 149.5,98.5 149.5,75.4 142.4,75.4 142.4,77.5 ccw(c141.9,77.5) 141.9,78 135.4,78 cw(c135.4,78.5) 134.9,78.5 134.9,81.2 ccw(c134.4,81.2) 134.4,81.7 118.4,81.7 cw(c118.4,82.2) 117.9,82.2 117.9,88 cw(c118.4,88) 118.4,88.5 133.3,88.5 ccw(c133.3,89) 133.8,89
+5V on Top Layer "Bottom Overlay-No Net" (solid, pour order 54): 116.3,99.5 ccw(c116.3,99) 115.8,99 115.8,96.5 117,96.5 117,97.7 cw(c117.5,97.7) 117.5,98.2 135.8,98.2 cw(c135.8,97.7) 136.3,97.7 136.3,89.8 ccw(c136.8,89.8) 136.8,89.3 143.1,89.3 ccw(c143.1,89.8) 143.6,89.8 143.6,98.5 ccw(c142.6,98.5) 142.6,99.5
+VBAT on Top Layer "Top Layer-No Net" (solid, remove dead copper, pour order 26): 78.5,98.5 cw(c79.5,98.5) 79.5,99.5 91.4,99.5 cw(c91.4,99) 91.9,99 91.9,93.9 90,93.9 ccw(c90,92.9) 89,92.9 89,84.5 cw(c88,84.5) 88,83.5 79.5,83.5 cw(c79.5,84.5) 78.5,84.5
NetC20_2 on Top Layer "Top Layer-No Net" (solid, remove dead copper, pour order 30): 93.4,99.5 ccw(c93.4,99) 92.9,99 92.9,93.9 97.2,93.9 ccw(c97.2,94.4) 97.7,94.4 97.7,97.4 cw(c98.2,97.4) 98.2,97.9 103.2,97.9 cw(c103.2,97.4) 103.7,97.4 103.7,94.4 ccw(c104.2,94.4) 104.2,93.9 108.2,93.9 cw(c108.2,92.9) 109.2,92.9 109.2,89.7 ccw(c109.7,89.7) 109.7,89.2 114.3,89.2 ccw(c114.3,89.7) 114.8,89.7 114.8,99 ccw(c114.3,99) 114.3,99.5
NetLi1_2 on Top Layer "Top Layer-No Net" (solid, remove dead copper, pour order 32): 26.5,99.5 ccw(c26.5,98.5) 25.5,98.5 25.5,84.502 ccw(c26.502,84.502) 26.502,83.5 75.5,83.5 ccw(c75.5,84.5) 76.5,84.5 76.5,98.5 ccw(c75.5,98.5) 75.5,99.5
VPNL_N on Top Layer "Top Layer-No Net" (solid, remove dead copper, pour order 25): 0.5,98.5 cw(c1.5,98.5) 1.5,99.5 23,99.5 cw(c23,98.5) 24,98.5 24,83.003 ccw(c25.003,83.003) 25.003,82 38,82 cw(c38,81) 39,81 39,62.6 ccw(c39.5,62.6) 39.5,62.1 40.5,62.1 40.5,61.1 39.5,61.1 ccw(c39.5,60.6) 39,60.6 39,59.002 cw(c37.998,59.002) 37.998,58 26,58 cw(c26,59) 25,59 25,69 ccw(c24,69) 24,70 1.5,70 cw(c1.5,71) 0.5,71
NetF1_1 on Top Layer "Top Layer-No Net" (solid, remove dead copper, pour order 28): 0.5,67.5 cw(c1.5,67.5) 1.5,68.5 12.5,68.5 cw(c12.5,67.5) 13.5,67.5 13.5,46 cw(c12.5,46) 12.5,45 1.502,45 cw(c1.502,46.002) 0.5,46.002
GND on Top Layer "Top Layer-No Net" (solid, remove dead copper, pour order 35): 0.5,41.5 cw(c1.5,41.5) 1.5,42.5 38,42.5 cw(c38,41.5) 39,41.5 39,28 ccw(c40,28) 40,27 47.9,27 cw(c47.9,26) 48.9,26 48.9,17.1 ccw(c49.9,17.1) 49.9,16.1 55.7,16.1 cw(c55.7,15.1) 56.7,15.1 56.7,9 ccw(c57.7,9) 57.7,8 116.9,8 ccw(c116.9,9) 117.9,9 117.9,14.5 cw(c118.9,14.5) 118.9,15.5 147,15.5 ccw(c147,16) 147.5,16 147.5,18 ccw(c147,18) 147,18.5 145.4,18.5 cw(c145.4,19) 144.9,19 144.9,20.1 cw(c145.4,20.1) 145.4,20.6 147,20.6 ccw(c147,21.1) 147.5,21.1 147.5,28.9 ccw(c147,28.9) 147,29.4 138.6,29.4 cw(c138.6,29.9) 138.1,29.9 138.1,35.9 140.5,35.9 ccw(c140.5,36.4) 141,36.4 141,38.4 ccw(c140.5,38.4) 140.5,38.9 135,38.9 ccw(c135,38.4) 134.5,38.4 134.5,37.1 133.3,37.1 133.3,40.3 cw(c133.8,40.3) 133.8,40.8 136.9,40.8 ccw(c136.9,41.283) 137.241,40.941 137.359,41.059 cw(c137.7,40.717) 137.7,41.2 140.5,41.2 ccw(c140.5,41.7) 141,41.7 141,45.4 ccw(c140.5,45.4) 140.5,45.9 137.6,45.9 cw(c137.6,46.4) 137.1,46.4 137.1,55.6 cw(c137.6,55.6) 137.6,56.1 139.6,56.1 ccw(c139.6,56.824) 140.112,56.312 142.117,58.317 ccw(c141.434,59) 142.4,59 142.4,75.4 149.5,75.4 149.5,1.5 cw(c148.5,1.5) 148.5,0.5 40.5,0.5 40.5,16.5 ccw(c39.5,16.5) 39.5,17.5 25.5,17.5 cw(c25.5,18.5) 24.5,18.5 24.5,25.998 ccw(c23.498,25.998) 23.498,27 1.5,27 cw(c1.5,28) 0.5,28
+VBAT on Top Layer "Top Layer-No Net" (solid, remove dead copper, pour order 41): 0.5,24.5 cw(c1.5,24.5) 1.5,25.5 22,25.5 cw(c22,24.5) 23,24.5 23,1.5 cw(c22,1.5) 22,0.5 1.5,0.5 cw(c1.5,1.5) 0.5,1.5
GND on Top Layer "Bottom Overlay-No Net" (solid, pour order 58): 103.7,92.5 cw(c104.2,92.5) 104.2,93 108,93 cw(c108,92.5) 108.5,92.5 108.5,89 ccw(c109,89) 109,88.5 114.3,88.5 cw(c114.3,88) 114.8,88 114.8,83.5 cw(c114.3,83.5) 114.3,83 99.9,83 cw(c99.9,83.5) 99.4,83.5 99.4,90.8 ccw(c98.9,90.8) 98.9,91.3 96.8,91.3 ccw(c96.8,90.8) 96.3,90.8 96.3,83.5 cw(c95.8,83.5) 95.8,83 91,83 cw(c91,83.5) 90.5,83.5 90.5,92.3 cw(c91,92.3) 91,92.8 100.3,92.8 cw(c100.3,92.3) 100.8,92.3 100.8,87.2 ccw(c101.3,87.2) 101.3,86.7 103.2,86.7 ccw(c103.2,87.2) 103.7,87.2
+12V on Top Layer "Bottom Overlay-No Net" (solid, pour order 52): 117.9,97 cw(c118.4,97) 118.4,97.5 132.8,97.5 cw(c132.8,97) 133.3,97 133.3,89.7 cw(c132.8,89.7) 132.8,89.2 118.4,89.2 cw(c118.4,89.7) 117.9,89.7
+VPANEL on Top Layer "Top Layer-No Net" (solid, remove dead copper, pour order 43): 72.5,58.6 cw(c73.5,58.6) 73.5,59.6 101.5,59.6 cw(c101.5,58.6) 102.5,58.6 102.5,53.5 cw(c101.5,53.5) 101.5,52.5 101,52.5 cw(c101,53.5) 100,53.5 100,56 ccw(c99,56) 99,57 83,57 ccw(c83,56) 82,56 82,47.5 78,47.5 78,50 ccw(c77,50) 77,51 73.5,51 cw(c73.5,52) 72.5,52
+VPANEL on Top Layer "Top Layer-No Net" (solid, remove dead copper, pour order 42): 15,67.5 cw(c16,67.5) 16,68.5 22.5,68.5 cw(c22.5,67.5) 23.5,67.5 23.5,57.5 ccw(c24.5,57.5) 24.5,56.5 38,56.5 cw(c38,55.5) 39,55.5 39,46 cw(c38,46) 38,45 16,45 cw(c16,46) 15,46
+VBAT on Top Layer "Top Layer-No Net" (solid, remove dead copper, pour order 45): 83.5,49.5 cw(c84.5,49.5) 84.5,50.5 94,50.5 cw(c94,49.5) 95,49.5 95,40.5 93,40.5 93,41.5 ccw(c92,41.5) 92,42.5 84.5,42.5 cw(c84.5,43.5) 83.5,43.5
NetCs1_2 on Top Layer "Top Layer-No Net" (solid, remove dead copper, pour order 44): 83.5,56 97.5,56 cw(c97.5,55) 98.5,55 98.5,52 ccw(c99.5,52) 99.5,51 101.5,51 cw(c101.5,50) 102.5,50 102.5,44.5 cw(c101.5,44.5) 101.5,43.5 97.5,43.5 cw(c97.5,44.5) 96.5,44.5 96.5,51 ccw(c95.5,51) 95.5,52 83.5,52
GATE on Top Layer "Top Layer-No Net" (solid, remove dead copper, pour order 46): 72.5,48.5 cw(c73.5,48.5) 73.5,49.5 76,49.5 cw(c76,48.5) 77,48.5 77,42.5 ccw(c78,42.5) 78,41.5 91.5,41.5 cw(c91.5,40.5) 92.5,40.5 92.5,36 90.5,36 90.5,37.5 ccw(c89.5,37.5) 89.5,38.5 73.5,38.5 cw(c73.5,39.5) 72.5,39.5
NetCi1_2 on Top Layer "Top Layer-No Net" (solid, remove dead copper, pour order 38): 71.5,21 ccw(c72.5,21) 72.5,20 87.5,20 ccw(c87.5,21) 88.5,21 88.5,33 ccw(c87.5,33) 87.5,34 84.5,34 ccw(c84.5,33) 83.5,33 83.5,26.5 cw(c82.5,26.5) 82.5,25.5 77.5,25.5 cw(c77.5,26.5) 76.5,26.5 76.5,33 ccw(c75.5,33) 75.5,34 72.5,34 ccw(c72.5,33) 71.5,33

## Keep-outs
Keep-Out Layer:
  the board outline again, w0.1

## Silkscreen, mask and mechanical layers (free items; w line width, h text height)
Top Overlay:
  the board outline again, w0.254
  text "Panel Connection" at 12.6,62.6 h1.52 r90
  text "Battery Connection" at 1.6,14.6 h1.52 r90
Bottom Overlay:
  lines w0.254: 52.8,1.9 124.8,1.9 124.8,85.9 52.8,85.9 52.8,1.9
  text "Dissipador" at 54,3.5 h3
Mechanical 15:
  the board outline again, w0.1

## Dimensions
0,0 to 150,0 on Top Overlay
0,100 to 0,0 on Top Overlay

## Text inside footprints (layer, text, board x,y; h text height)
U1: Top Overlay "ref" at 80.825,79.912 h1 r90; Top Overlay "M" at 79.047,79.912 h1 r90; Top Overlay "0" at 77.142,79.912 h1 r90; Top Overlay "+" at 75.618,79.912 h1.52 r90; Top Overlay "OUT" at 75.364,85.754 h1.52 r90; Top Overlay "IN" at 81.079,87.151 h1.52 r90